# Altium PCB PCB1.PcbDoc
Units mil, origin at the board's own origin, x right, y up, seen from the top; angles counter-clockwise.
Board outline 10000 x 8000 mil, 2 copper layers (Top Layer, Bottom Layer); 10 components, 29 nets, 50 pads, 0 vias.
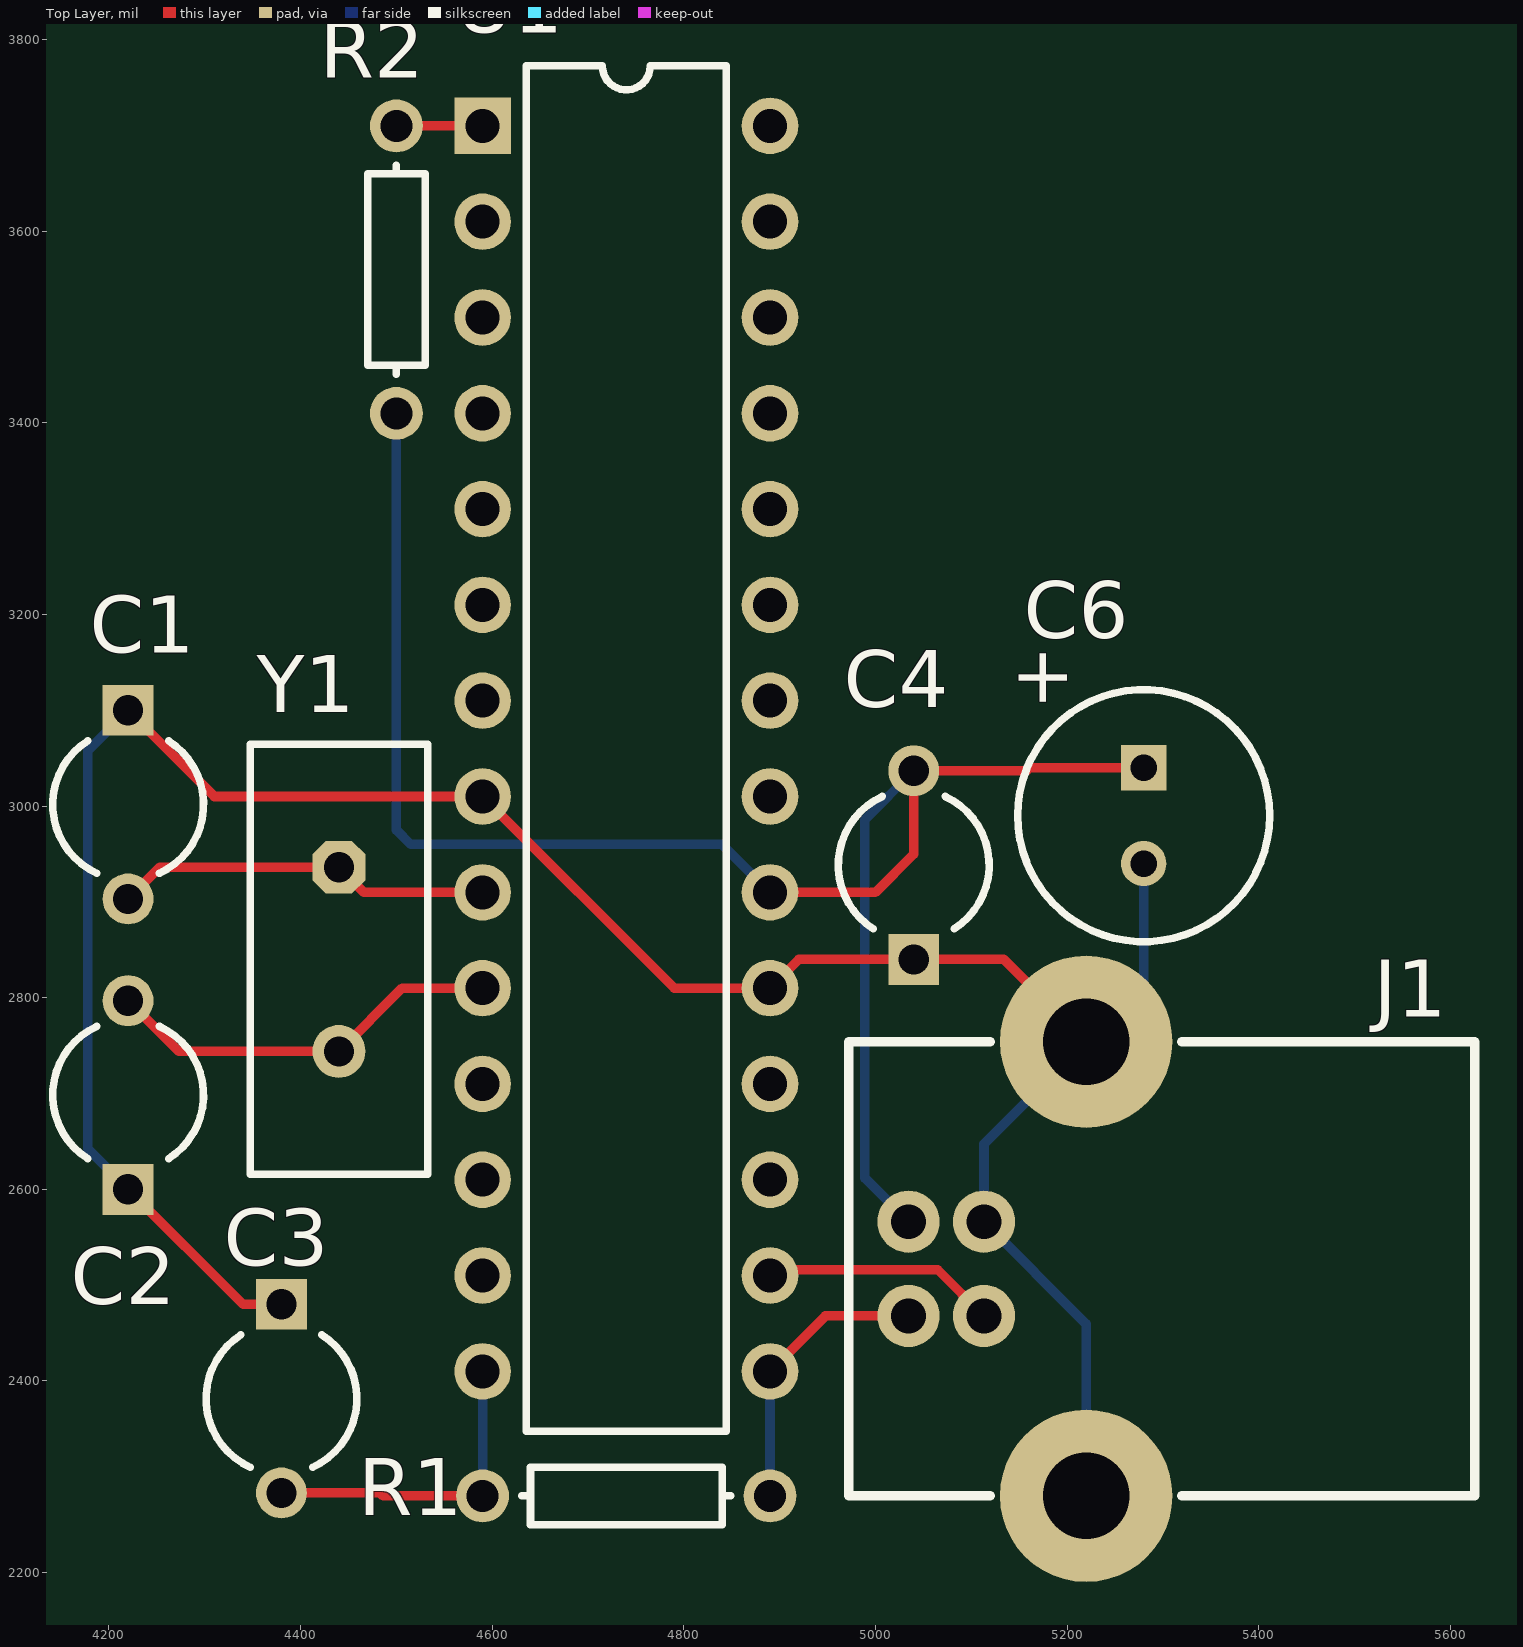
[diagram p0: Top Layer view]
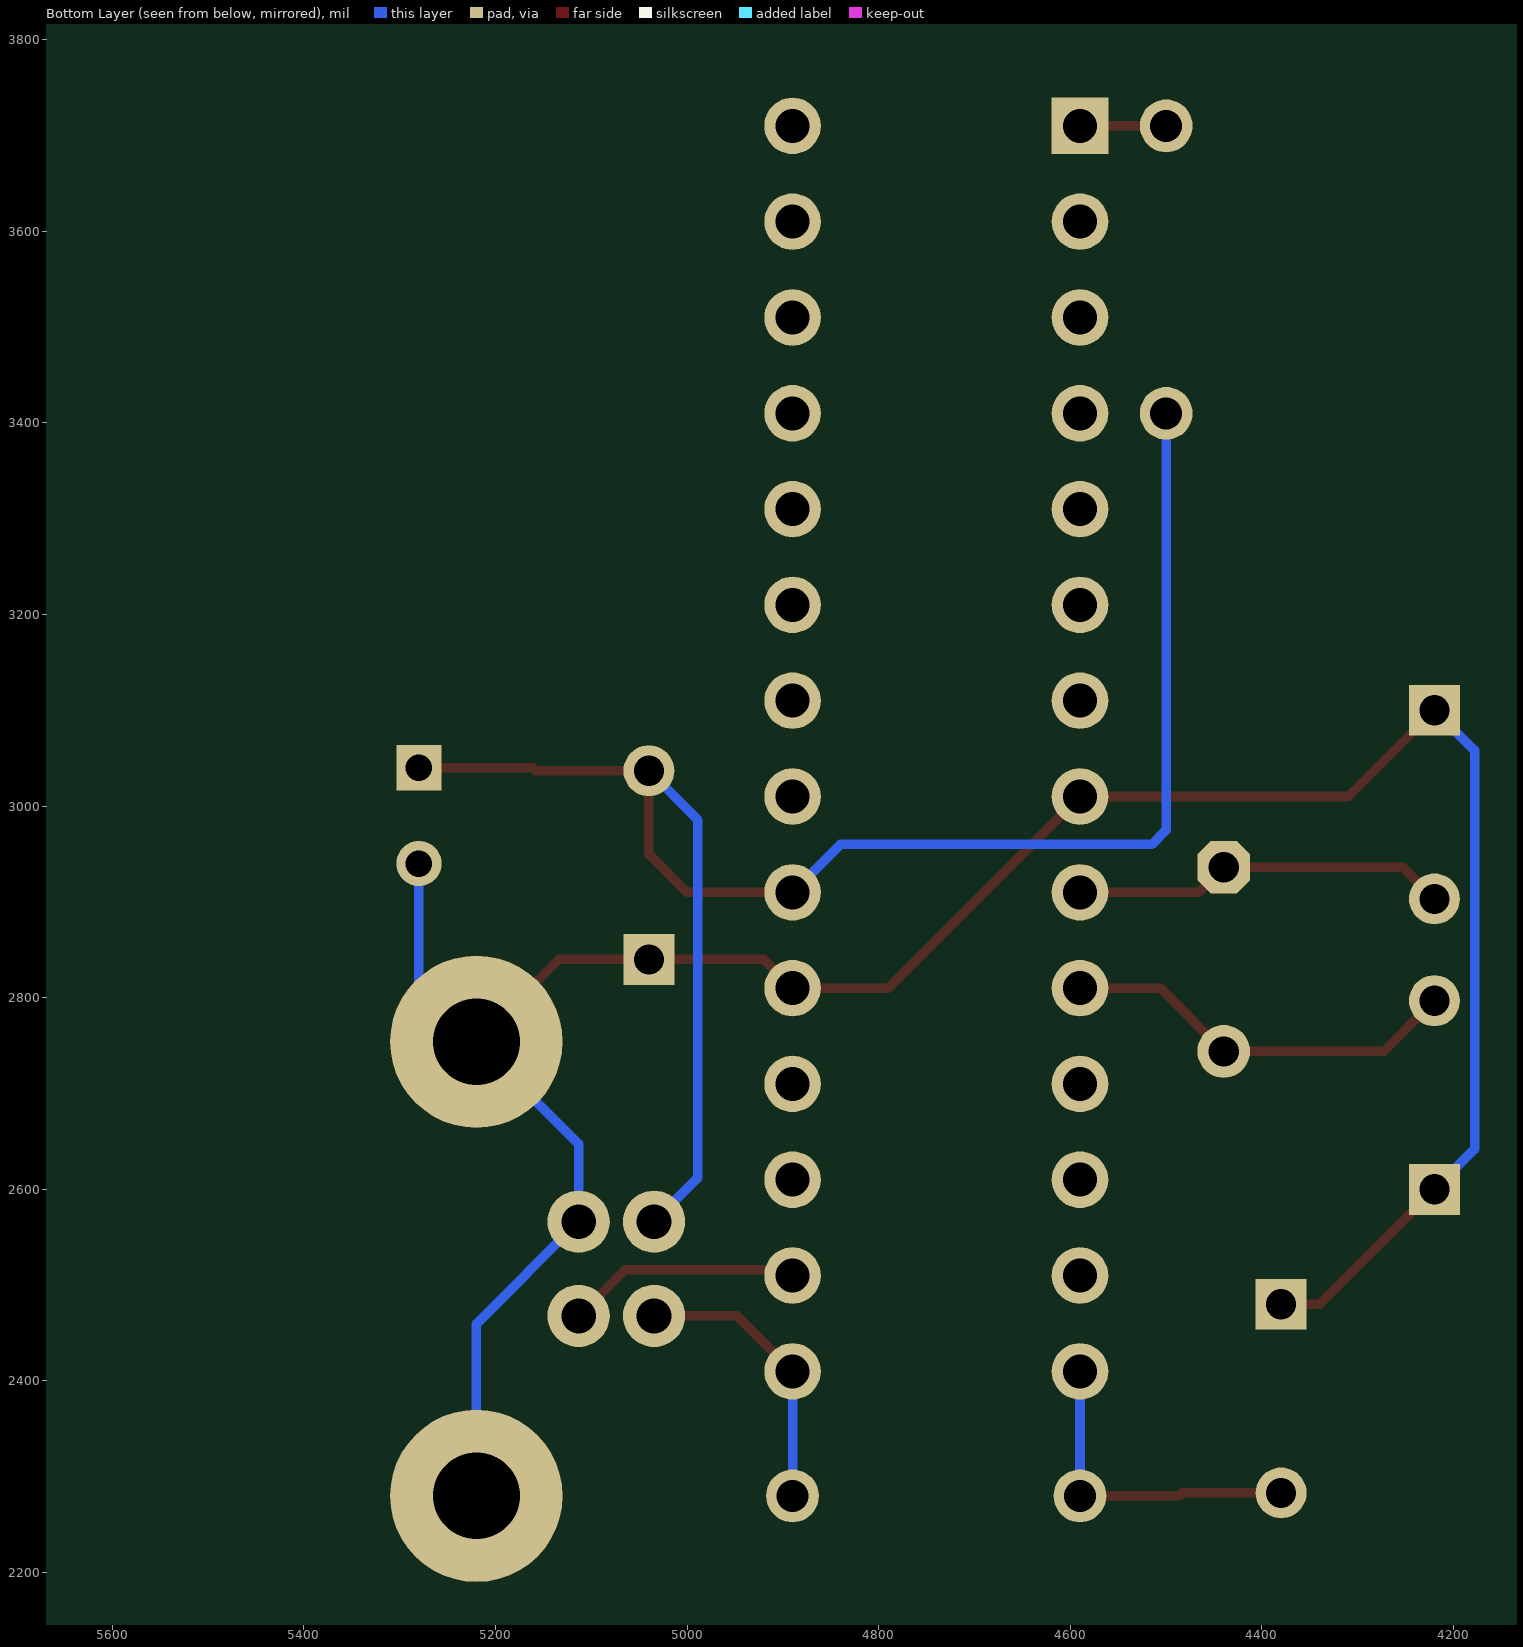
[diagram p1: Bottom Layer view, seen from below]

## Layer stack, top to bottom
Top Layer: signal copper 1.4
Dielectric: dielectric 12.6, FR-4, Dk 4.8
Bottom Layer: signal copper 1.4

## Board outline
0,0 10000,0 10000,8000 0,8000

## Design rules (kind name [scope] priority, off if disabled: settings)
Clearance [All] p1: gap=10
ComponentClearance [All] p1: gap=10 collisioncheckmode=0
HoleSize [All] p1: absolutevalues=TRUE maxlimit=200 minlimit=1 maxpercent=80.000 minpercent=20.000
PolygonConnect [All] p1: connectstyle=Relief reliefconductorwidth=10 reliefentries=4 polygonreliefangle="90 Angle"
RoomDefinition Sheet1 [InComponentClass('Sheet1')] p1: confinementstyle=ConfineIn formatcopy=TRUE outline 2340,8140 4340,8140 4340,9140 2340,9140
RoutingCorners [All] p1: cornerstyle=Round minsetback=100 maxsetback=100
RoutingLayers [All] p1: top layer=Horizontal bottom layer=Vertical
RoutingVias [All] p1: holewidth=15 width=25 viastyle="Through Hole" minholewidth=15 minwidth=25 maxholewidth=15 maxwidth=25
SolderMaskExpansion [All] p1: expansion=4
TestPointUsage [All] p1: valid=0 allowmultiple=FALSE
Testpoint [All] p1: side=15 testpointundercomponent=TRUE minsize=40 maxsize=100 preferedsize=60 minholesize=0 maxholesize=40 preferedholesize=32 testpointgrid=1 style=1023 order=1234567890
Width [All] p1: maxlimit=30 minlimit=10 preferedwidth=10 minimp=50.000000 maximp=50.000000 favimp=50.000000
14 further rules are at their usual default settings.

## Components (designator, comment, footprint, x,y, rotation, side; value= is the part's Value field where it differs from the comment)
C1 "Cap2" CAPR5-4X5 4220,3100 r270 top
C2 "Cap2" CAPR5-4X5 4220,2600 r90 top
C3 "" CAPR5-4X5 4380,2480 r270 top
C4 "" CAPR5-4X5 5040,2840 r90 top
C6 "Cap Pol1" CAP-EE-1 5280,3140 r90 top
J1 "USB Type B" USB-TYPEB 5220,2280 r90 top
R1 "Res1" AXIAL-0.3 4740,2280 r0 top
R2 "Res1" AXIAL-0.3 4500,3560 r270 top
U1 "PIC16C745" DIP-28 4740,3060 r270 top
Y1 "6 MHz" BCY-W2/E4.7 4440,2840 r270 top

## Footprints (in the part's own frame and the unit in brackets; to place one, negate y for a bottom-side part, rotate by r counter-clockwise, add the part's x,y. Pads: shape width x height; smd on the part's side, far side on the other; paste and mask are expansions set on the pad)
AXIAL-0.3 [mm]
  round 1.4 hole 0.85: 1(-3.81,0) 2(3.81,0)
  silkscreen extent -2.77,-0.76 2.77,0.76
BCY-W2/E4.7 [mm]
  oct 1.4x1.4 hole 0.8: 1(-2.44,0)
  round 1.4 hole 0.8: 2(2.44,0)
  silkscreen extent -5.7,-2.35 5.7,2.35
CAP-EE-1 [mm]
  rect 1.2x1.2 hole 0.7: 1(-2.54,0)
  round 1.2 hole 0.7: 2(-5.08,0)
  silkscreen extent -7.15,-3.34 -0.47,3.34
CAPR5-4X5 [mm]
  rect 1.35x1.35 hole 0.8: 1(0,0)
  round 1.35 hole 0.8: 2(5,0)
  silkscreen extent 0.81,-2 4.32,2
DIP-28 [mm]
  rect 1.5x1.5 hole 0.9: 1(-16.51,-3.81)
  round 1.5 hole 0.9: 2(-13.97,-3.81) 3(-11.43,-3.81) 4(-8.89,-3.81) 5(-6.35,-3.81) 6(-3.81,-3.81) 7(-1.27,-3.81) 8(1.27,-3.81) 9(3.81,-3.81) 10(6.35,-3.81) 11(8.89,-3.81) 12(11.43,-3.81) 13(13.97,-3.81) 14(16.51,-3.81) 15(16.51,3.81) 16(13.97,3.81) 17(11.43,3.81) 18(8.89,3.81) 19(6.35,3.81) 20(3.81,3.81) 21(1.27,3.81) 22(-1.27,3.81) 23(-3.81,3.81) 24(-6.35,3.81) 25(-8.89,3.81) 26(-11.43,3.81) 27(-13.97,3.81) 28(-16.51,3.81)
  silkscreen extent -18.1,-2.65 18.1,2.65
USB-TYPEB [mil]
  round 65 hole 36.22: 1(286.22,185.43) 2(187.8,185.43) 3(187.8,106.69) 4(286.22,106.69)
  round 180 hole 90.55: 5(0,0) 5(474.02,0)
  silkscreen extent 0,-406 474,248

## Part data
C1 C2: "Capacitor"
C3 C4: library part Cap2, "Capacitor"
C6: "Polarized Capacitor (Radial)"
J1: "Header, 4-Pin"
R1 R2: "Resistor"
U1: "EPROM-Based 8-Bit CMOS Microcontroller with USB"
Y1: library part XTAL, "Crystal Oscillator"

## Nets (pads, with @x,y where several pads share a name; then routed paths per layer and width w, separated by ;. In a path a pad name is that pad's centre, name@x,y a point inside that pad or via, vN(x,y) a via of type N, cw(c..) or ccw(c..) an arc to the next point about the centre after c; other vN are vias at no path point)
GND: C1.1 C2.1 C3.1 C4.1 C6.2 J1.4 J1.5 U1.8 U1.19 | length 2685.9
  Top Layer w10: C2.1 4340,2480 C3.1 ; C1.1 4310,3010 U1.8 4790,2810 U1.19 4920,2840 C4.1 5134.02,2840 J1.5@5220,2754.02
  Bottom Layer w10: C2.1 4178,2642 4178,3058 C1.1 ; J1.5@5220,2280 5220,2459.53 J1.4 5113.31,2647.32 5220,2754.02 5280,2814.02 C6.2
NetC1_2: C1.2 U1.9 Y1.1 | length 394.4
  Top Layer w10: C1.2 4252.91,2936.06 Y1.1 4466.06,2910 U1.9
NetC2_2: C2.2 U1.10 Y1.2 | length 419.3
  Top Layer w10: C2.2 4272.91,2743.94 Y1.2 4506.06,2810 U1.10
NetC3_2: C3.2 R1.1 U1.14 | length 341.3
  Top Layer w10: C3.2 4483,2283.15 4486.15,2280 R1.1
  Bottom Layer w10: R1.1 U1.14
NetC14_1: 
NetC14_2: 
NetC15_1: 
NetC17_1: 
NetC17_2: 
NetC20_1: 
NetC20_2: 
NetC21_1: 
NetC21_2: 
NetC22_1: 
NetC22_2: 
NetC23_1: 
NetC23_2: 
NetJ1_2: J1.2 R1.2 U1.15 | length 298.5
  Top Layer w10: U1.15 4947.8,2467.8 J1.2
  Bottom Layer w10: R1.2 U1.15
NetJ1_3: J1.3 U1.16 | length 249.3
  Top Layer w10: U1.16 4890,2516 5065.1,2516 J1.3
NetL24_1: 
NetL25_1: 
NetL26_1: 
NetL27_1: 
NetR2_1: R2.1 U1.1 | length 90
  Top Layer w10: R2.1 U1.1
NetR6_2: 
NetR7_2: 
NetR10_2: 
NetR11_2: 
VCC: C4.2 C6.1 J1.1 R2.2 U1.20 | length 1857.3
  Top Layer w10: U1.20 5000,2910 5040,2950 C4.2 5158,3036.85 5161.15,3040 C6.1
  Bottom Layer w10: R2.2 4500,2975 4515,2960 4840,2960 U1.20 ; J1.1 4989,2611.79 4989,2985.85 C4.2
pads on no net: U1.2 U1.3 U1.4 U1.5 U1.6 U1.7 U1.11 U1.12 U1.13 U1.17 U1.18 U1.21 U1.22 U1.23 U1.24 U1.25 U1.26 U1.27 U1.28

## Text inside footprints (layer, text, board x,y; h text height)
C6: Top Overlay "+" at 5200,3100 h59.06 r90